# Altium PCB Booster_USER_IFC.PcbDoc (part 2 of 2)
Units mm, origin at the board's own origin, x right, y up, seen from the top; angles counter-clockwise.
Board outline 78 x 45 mm, 2 copper layers (Top Layer, Bottom Layer), stack 1.571 mm thick; 75 components, 89 nets, 332 pads, 99 vias.
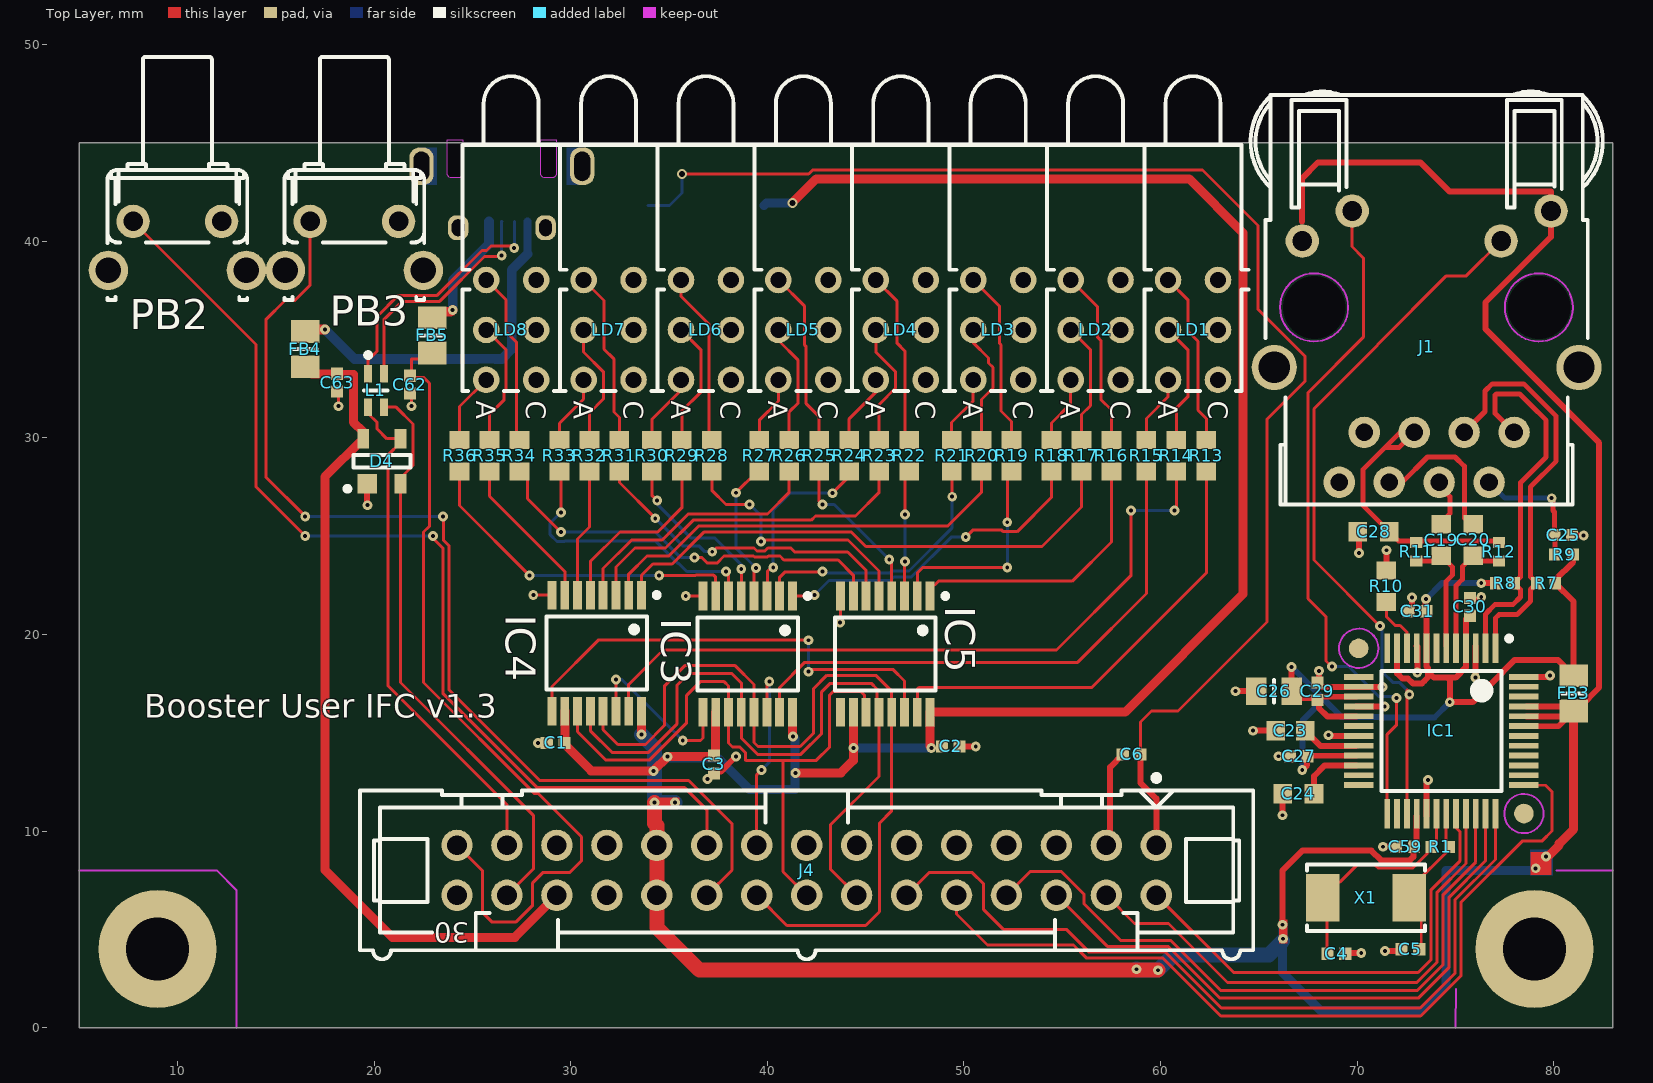
[diagram p0: Top Layer view]

## Silkscreen, mask and mechanical layers (free items; w line width, h text height) (continued)
Mechanical 1:
  drawing of 196 lines, arcs and shapes, not listed
  text "Layer" at -1.591,-8.661 h1.52
  text "Name" at 8.82,-8.661 h1.52
  text "Material" at 32.436,-8.661 h1.52
  text "Thickness" at 54.274,-8.661 h1.52
  text "Constant" at 70.78,-8.661 h1.52
  text "Board Layer Stack" at 85.254,-8.661 h1.52
  text "1" at -1.591,-11.709 h1.52
  text "Top Overlay" at 8.82,-11.709 h1.52
  text "2" at -1.591,-14.757 h1.52
  text "Top Solder" at 8.82,-14.757 h1.52
  text "Solder Resist" at 32.436,-14.757 h1.52
  text "0.010mm" at 54.274,-14.757 h1.52
  text "3.5" at 70.78,-14.757 h1.52
  text "3" at -1.591,-17.805 h1.52
  text "Top Layer" at 8.82,-17.805 h1.52
  text "Copper" at 32.436,-17.805 h1.52
  text "0.036mm" at 54.274,-17.805 h1.52
  text "4" at -1.591,-20.853 h1.52
  text "Dielectric 1" at 8.82,-20.853 h1.52
  text "FR-4" at 32.436,-20.853 h1.52
  text "1.500mm" at 54.274,-20.853 h1.52
  text "4.8" at 70.78,-20.853 h1.52
  text "5" at -1.591,-23.901 h1.52
  text "Bottom Layer" at 8.82,-23.901 h1.52
  text "Copper" at 32.436,-23.901 h1.52
  text "0.036mm" at 54.274,-23.901 h1.52
  text "6" at -1.591,-26.949 h1.52
  text "Bottom Solder" at 8.82,-26.949 h1.52
  text "Solder Resist" at 32.436,-26.949 h1.52
  text "0.010mm" at 54.274,-26.949 h1.52
  text "3.5" at 70.78,-26.949 h1.52
  text "7" at -1.591,-29.997 h1.52
  text "Bottom Overlay" at 8.82,-29.997 h1.52

## Text inside footprints (layer, text, board x,y; h text height)
J2: Drill Drawing "0.85" at 24.998,47.916 h1 r180; Drill Drawing "1.87" at 26.141,45.311 h1 r90; Drill Drawing "r0.2" at 28.8,42.3 h1 r180; Mechanical 8 "PCB end" at 22.2,46.075 h0.5 r180
J4: Top Overlay "30" at 24.855,5.333 h1.02 r180; Mechanical 14 "30" at 24.855,5.333 h1.02 r180
LD1: Top Overlay "A" at 59.867,31.873 h1 r270; Top Overlay "C" at 62.407,31.873 h1 r270; Mechanical 14 "A" at 59.845,31.878 h1 r270; Mechanical 14 "C" at 62.445,31.878 h1 r270
LD2: Top Overlay "A" at 54.914,31.873 h1 r270; Top Overlay "C" at 57.454,31.873 h1 r270; Mechanical 14 "A" at 54.892,31.878 h1 r270; Mechanical 14 "C" at 57.492,31.878 h1 r270
LD3: Top Overlay "A" at 49.961,31.873 h1 r270; Top Overlay "C" at 52.501,31.873 h1 r270; Mechanical 14 "A" at 49.939,31.878 h1 r270; Mechanical 14 "C" at 52.539,31.878 h1 r270
LD4: Top Overlay "A" at 45.008,31.873 h1 r270; Top Overlay "C" at 47.548,31.873 h1 r270; Mechanical 14 "A" at 44.986,31.878 h1 r270; Mechanical 14 "C" at 47.586,31.878 h1 r270
LD5: Top Overlay "A" at 40.055,31.873 h1 r270; Top Overlay "C" at 42.595,31.873 h1 r270; Mechanical 14 "A" at 40.033,31.878 h1 r270; Mechanical 14 "C" at 42.633,31.878 h1 r270
LD6: Top Overlay "A" at 35.102,31.873 h1 r270; Top Overlay "C" at 37.642,31.873 h1 r270; Mechanical 14 "A" at 35.08,31.878 h1 r270; Mechanical 14 "C" at 37.68,31.878 h1 r270
LD7: Top Overlay "A" at 30.149,31.873 h1 r270; Top Overlay "C" at 32.689,31.873 h1 r270; Mechanical 14 "A" at 30.127,31.878 h1 r270; Mechanical 14 "C" at 32.727,31.878 h1 r270
LD8: Top Overlay "A" at 25.196,31.873 h1 r270; Top Overlay "C" at 27.736,31.873 h1 r270; Mechanical 14 "A" at 25.174,31.878 h1 r270; Mechanical 14 "C" at 27.774,31.878 h1 r270